# EAGLE board ospi_v10 (EAGLE 6.4)
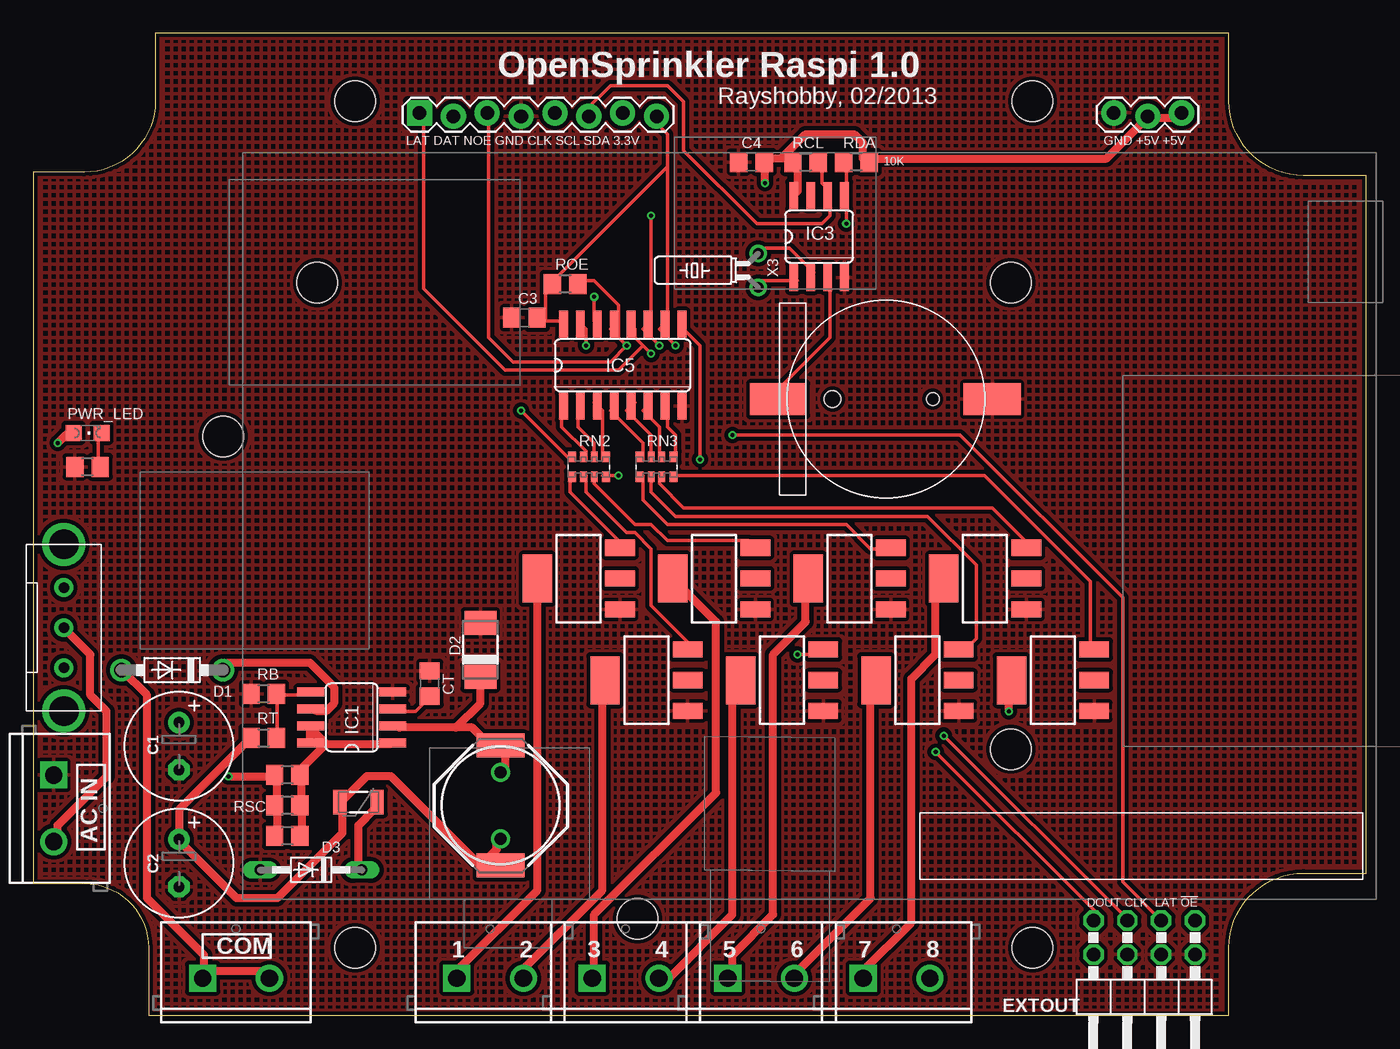
[diagram p0: board, top side]
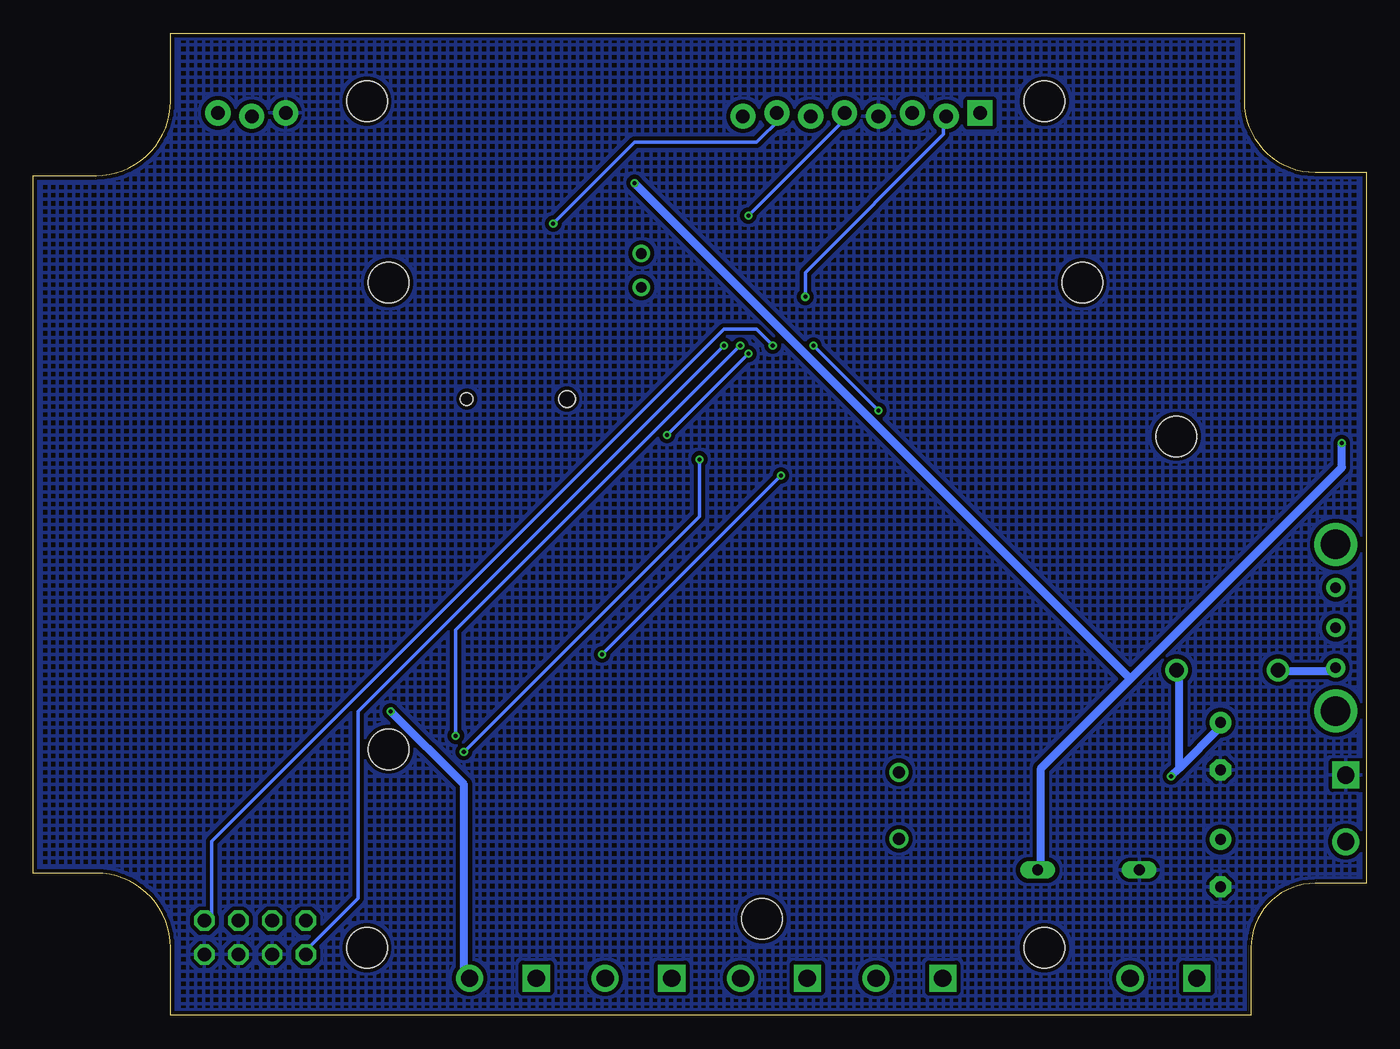
[diagram p1: board, bottom side, seen from below]

Size 99.95 x 73.66 mm. Coordinates in mm from the lower left corner, seen from the top.
Outline: 8.64,0 89.66,0 89.66,5.08 arc-90 95.25,10.67 99.95,10.67 99.95,62.99 95.25,62.99 arc-90 89.66,68.58 89.66,73.66 9.14,73.66 9.14,68.58 arc-90 3.81,63.25 0,63.25 0,9.91 3.81,9.91 arc-90 8.64,5.08 8.64,0
Copper layers (1*16): Top 0.035mm / dielectric 1.5mm / Bottom 0.035mm
Design rules "Fusion_eagle_rule_v1.1": minimum track width 6mil, minimum drill 12mil, track to track 6mil, track to pad 6mil, pad to pad 6mil, via to via 6mil, smd to smd 0mil, copper to edge 10mil, drill to drill 10mil, minimum pad ring 10mil, minimum via ring 6mil, stop-mask expansion 2mil, vias tented up to drill 100mil, thermal gap 10mil
Net classes: 0 default: width 0.254 mm, clearance 0.203 mm; 1 power: width 0.61 mm, clearance 0.203 mm
Holes 3.05 mm at 24.13,5.08 74.93,5.08 24.13,68.58 74.93,68.58
vRestrict: area 21.6,2.5 to 26.7,7.6; area 72.4,2.5 to 77.5,7.6; area 3.3,12.7 to 5.3,18.5; area 12.7,4.3 to 17.8,6.1; area 72.6,0.3 to 78.2,1.3

## Footprints (pad centres in the part's own frame; a part is rotated, then mirrored left to right if it is on the bottom)
BATTCON_12MM_SMT = smd 2.4 x 4.3: P$1 0,11.96 | smd 2.4 x 4.2: P$2 0,-4.1 | hole 0.95: 0,7.5 | hole 1.25: 0,0
E3,5-8 = drill 0.813 pad 1.6: + -1.778,0 | drill 0.813 pad 1.6 octagon: - 1.778,0
C0805 = smd 1.3 x 1.5: 1 -0.95,0; 2 0.95,0
SCREWTERMINAL-5MM-2 = drill 1.3 pad 2.032 square: 1 0,0 | drill 1.3 pad 2.032: 2 5,0
DO41-7.6 = drill 1.1 pad 1.7: A 3.81,0; C -3.81,0
DO-214AC = smd 1.8 x 2.4: A 2.025,0; C -2.025,0
DO34-7 = drill 0.813 long: A 3.81,0; C -3.81,0
2X04/90 = drill 1.016 octagon: 1 -3.81,-6.35; 2 -3.81,-3.81; 3 -1.27,-6.35; 4 -1.27,-3.81; 5 1.27,-6.35; 6 1.27,-3.81; 7 3.81,-6.35; 8 3.81,-3.81
PTC-1206 = smd 1 x 1.8: 1 -1.4,0; 2 1.4,0
SO08 = smd 0.66 x 2.032: 1 -1.905,-3.073; 2 -0.635,-3.073; 3 0.635,-3.073; 4 1.905,-3.073; 5 1.905,3.073; 6 0.635,3.073; 7 -0.635,3.073; 8 -1.905,3.073
SO16 = smd 0.66 x 2.032: 1 -4.445,-3.073; 2 -3.175,-3.073; 3 -1.905,-3.073; 4 -0.635,-3.073; 5 0.635,-3.073; 6 1.905,-3.073; 7 3.175,-3.073; 8 4.445,-3.073; 9 4.445,3.073; 10 3.175,3.073; 11 1.905,3.073; 12 0.635,3.073; 13 -0.635,3.073; 14 -1.905,3.073; 15 -3.175,3.073; 16 -4.445,3.073
EG1206 = drill 0.8 pad 1.422: 1 -3,0; 2 0,0; 3 3,0 | drill 2.2: MT1 -6.25,0; MT2 6.25,0
1X08_LOCK = drill 1.016 pad 1.88 square: 1 0,0.127 | drill 1.016 pad 1.88: 2 2.54,-0.127; 3 5.08,0.127; 4 7.62,-0.127; 5 10.16,0.127; 6 12.7,-0.127; 7 15.24,0.127; 8 17.78,-0.127
1X03_LOCK = drill 1.016 pad 1.88: 1 0,0.127; 2 2.54,-0.127; 3 5.08,0.127
SRU1038 = smd 1.8 x 3.6: 1 -4.5,0; 2 4.5,0
6000-XXXX-RC = drill 0.9 pad 1.422: 1 -2.5,0; 2 2.5,0
CHIPLED_0805 = smd 1.2 x 1.2: A 0,-1.05; C 0,1.05
R0805 = smd 1.3 x 1.5: 1 -0.95,0; 2 0.95,0
EXB38V = smd 0.6 x 0.8: 1 -1.275,-0.75; 4 1.275,-0.75; 5 1.275,0.75; 8 -1.275,0.75 | smd 0.5 x 0.8: 2 -0.4,-0.75; 3 0.4,-0.75; 6 0.4,0.75; 7 -0.4,0.75
SOT223 = smd 1.219 x 2.235: 1 -2.311,-3.099; 2 0,-3.099; 3 2.311,-3.099 | smd 3.6 x 2.2: 4 0,3.099
OSPI = hole 3.048: 25,-6; 53,6.735; 84.06,-29.465; 77,-41; 25,-41
TC26H = drill 0.813: 1 -1.27,0; 2 1.27,0

## Placement (x,y rotation side)
BAT1  [BATTCON_12MM_SMT]  59.94,46.23 270 top
C1  100u  [E3,5-8]  10.92,20.19 270 top
C2  470u  [E3,5-8]  10.92,11.43 270 top
C3  0.1u  [C0805]  36.83,52.32 180 top
C4  0.1u  [C0805]  53.85,64.01 180 top
COM  [SCREWTERMINAL-5MM-2]  12.7,2.79 0 top
CT  68pF  [C0805]  29.72,24.89 90 top
D1  R3000  [DO41-7.6]  10.41,25.91 180 top
D2  SS14  [DO-214AC]  33.53,27.43 90 top
D3  5.1V  [DO34-7]  20.83,10.92 180 top
EXTOUT1  [2X04/90]  83.31,0.76 180 top
F1  PTCSMD  [PTC-1206]  24.38,16 180 top
IC1  MC33063/MC34063D  [SO08]  23.88,22.35 90 top
IC3  DS1307  [SO08]  58.93,58.42 0 top
IC5  74HC595N  [SO16]  44.2,48.77 0 top
J0  24VAC IN  [SCREWTERMINAL-5MM-2]  1.52,18.03 270 top
J2  EG1206  [EG1206]  2.29,29.08 270 top
JP1  [1X08_LOCK]  28.96,67.56 0 top
JP2  [1X03_LOCK]  81.03,67.56 0 top
L1  100uH  [SRU1038]  35.05,15.75 270 top
L1'  220uH  [6000-XXXX-RC]  35.05,15.75 270 top
PWR_LED  [CHIPLED_0805]  4.06,43.69 270 top
RB  10K  [R0805]  17.27,24.13 180 top
RCL  10K  [R0805]  57.91,64.01 0 top
RDA  10K  [R0805]  61.72,64.01 180 top
RLED  330  [R0805]  4.06,41.15 180 top
RN2  [EXB38V]  41.66,41.15 0 top
RN3  [EXB38V]  46.74,41.15 0 top
ROE  10K  [R0805]  39.88,54.86 180 top
RSC  1.0  [R0805]  19.05,18.03 180 top
RSC1  1.0  [R0805]  19.05,15.75 180 top
RSC2  1.0  [R0805]  19.05,13.46 180 top
RT  30K  [R0805]  17.27,20.83 0 top
S12  [SCREWTERMINAL-5MM-2]  31.75,2.79 0 top
S34  [SCREWTERMINAL-5MM-2]  41.91,2.79 0 top
S56  [SCREWTERMINAL-5MM-2]  52.07,2.79 0 top
S78  [SCREWTERMINAL-5MM-2]  62.23,2.79 0 top
T1  MAC97  [SOT223]  40.89,32.77 90 top
T2  MAC97  [SOT223]  45.97,25.15 90 top
T3  MAC97  [SOT223]  51.05,32.77 90 top
T4  MAC97  [SOT223]  56.13,25.15 90 top
T5  MAC97  [SOT223]  61.21,32.77 90 top
T6  MAC97  [SOT223]  66.29,25.15 90 top
T7  MAC97  [SOT223]  71.37,32.77 90 top
T8  MAC97  [SOT223]  76.45,25.15 90 top
U$2  OSPI  [OSPI]  98.3,13.97 180 top
X3  32.657k  [TC26H]  54.36,55.88 90 top

## Library data of the parts
BAT1 JP1 L1 = SparkFunNew
C1 C2 = resistor
C3 C4 CT L1' RB RCL RDA RLED ROE RSC RSC1 RSC2 RT = rcl
COM F1 IC5 J0 JP2 S12 S34 S56 S78 T1-T8 = SparkFun
D1-D3 = diode
EXTOUT1 = pinhead
IC1 IC3 J2 PWR_LED = adafruit
RN2 RN3 = resistor-dil; OC_FARNELL: unknown; OC_NEWARK: unknown
U$2 = RaspberryPi
X3 = crystal; OC_FARNELL: unknown; OC_NEWARK: unknown

## Nets
24VAC [power]: COM.1 COM.2 D1.A J2.3
A1: EXTOUT1.1 IC5.13 JP1.3 ROE.1
D5: IC5.14 JP1.2
D6: EXTOUT1.5 IC5.11 JP1.5
D7: EXTOUT1.3 IC5.12 JP1.1
GND [power]: BAT1.P$1 C1.- C2.- C3.2 C4.2 CT.2 D2.A D3.A EXTOUT1.2 EXTOUT1.4 EXTOUT1.6 IC1.4 IC3.4 IC5.8 J0.1 JP1.4 JP2.1 RB.2 RLED.2 T1.1 T2.1 T3.1 T4.1 T5.1 T6.1 T7.1 T8.1
N$1: PWR_LED.C RLED.1
N$2 [power]: C1.+ D1.C IC1.6 RSC1.2 RSC2.2 RSC.2
N$3: RN2.1 T1.3
N$4: IC5.5 RN3.7
N$5: IC5.6 RN3.6
N$6 [power]: J0.2 J2.2
N$7: IC5.7 RN3.5
N$10: IC5.4 RN3.8
N$11: IC5.3 RN2.5
N$12: IC5.2 RN2.6
N$13: IC5.1 RN2.7
N$14: IC5.15 RN2.8
N$15: RN2.2 T2.3
N$16 [power]: S12.1 T1.4
N$17 [power]: S12.2 T2.4
N$18 [power]: S34.1 T3.4
N$19: RN2.3 T3.3
N$20 [power]: S34.2 T4.4
N$21: RN2.4 T4.3
N$22 [power]: S56.1 T5.4
N$23 [power]: S56.2 T6.4
N$24 [power]: S78.1 T7.4
N$25 [power]: S78.2 T8.4
N$26: RN3.1 T5.3
N$27: RN3.2 T6.3
N$28: RN3.3 T7.3
N$29: RN3.4 T8.3
N$36: BAT1.P$2 IC3.3
N$40 [power]: IC1.1 IC1.7 IC1.8 RSC1.1 RSC2.1 RSC.1
N$46 [power]: D2.C IC1.2 L1'.1 L1.1
N$47: IC3.1 X3.1
N$49: CT.1 IC1.3
N$50: IC3.2 X3.2
N$55: IC1.5 RB.1 RT.2
QH*: EXTOUT1.7 IC5.9
SCL: IC3.6 JP1.6 RCL.2
SDA: IC3.5 JP1.7 RDA.2
VCC: C3.1 EXTOUT1.8 IC5.10 IC5.16 JP1.8 ROE.2
VIN [power]: C4.1 D3.C F1.1 IC3.8 JP2.2 JP2.3 PWR_LED.A RCL.1 RDA.1
VIN_PRE [power]: C2.+ F1.2 L1'.2 L1.2 RT.1

## Tracks (layer width: path | path; a pad name or v marks a point on that pad's centre or on a via)
24VAC
  Top 0.61: 12.8,3.3 17.68,3.3 COM.2 | 12.8,3.3 12.8,4.52 8.53,8.79 8.53,24.03 6.71,25.86 D1.A | 12.8,3.3 COM.1
  Bottom 0.61: J2.3 2.44,25.86 6.1,25.86 D1.A
A1  (via drill 0.3)
  Top 0.254: 43.89,52.07 43.89,53.29 42.06,55.12 40.84,55.12 ROE.1 | 43.89,52.07 43.28,51.46 IC5.13 | 43.89,52.07 43.89,50.85 v44.5,50.24 43.28,49.02 35.97,49.02 34.14,50.85 34.14,67.31 JP1.3
  Bottom 0.254: v44.5,50.24 45.72,51.46 48.16,51.46 86.56,13.06 86.56,7.57 EXTOUT1.1
D5  (via drill 0.3)
  Top 0.254: v42.06,53.9 42.06,52.07 IC5.14
  Bottom 0.254: v42.06,53.9 42.06,55.73 31.7,66.09 31.7,67.31 JP1.2
D6  (via drill 0.3)
  Top 0.254: v46.33,59.99 46.33,52.07 IC5.11 45.72,51.46 v46.94,50.24 | v68.28,20.98 81.69,7.57 EXTOUT1.5
  Bottom 0.254: v46.33,59.99 39.01,67.31 JP1.5 | v68.28,20.98 68.28,28.91 v46.94,50.24
D7  (via drill 0.3)
  Top 0.254: 45.72,50.24 45.11,50.85 45.11,51.46 IC5.12 | 45.72,50.24 43.89,48.41 35.36,48.41 29.26,54.51 29.26,67.31 JP1.1 | EXTOUT1.3 81.69,10.01 81.69,31.34 69.49,43.54 v52.43,43.54 | 45.72,50.24 v46.33,49.63
  Bottom 0.254: v46.33,49.63 v52.43,43.54
GND
  pour Bottom (isolate 0.305, hatched): 0,73.91 101.6,73.91 101.6,0.25 0,0.25
  pour Top (isolate 0.305, hatched): 0,73.91 101.6,73.91 101.6,0.25 0,0.25
N$1
  Top 0.254: PWR_LED.C 4.88,43.54 4.88,41.71 RLED.1
N$2  (via drill 0.3)
  Top 0.61: IC1.6 21.34,22.81 21.95,22.81 22.55,23.42 22.55,24.64 20.73,26.47 14.63,26.47 D1.C | RSC2.2 18.29,13.66 18.29,15.49 RSC1.2 18.29,16.1 18.29,17.93 RSC.2 17.68,17.93 v14.63,17.93
  Bottom 0.61: 14.02,18.54 10.97,21.59 C1.+ | 14.02,18.54 v14.63,17.93 | 14.02,18.54 14.02,25.86 D1.C
N$3
  Top 0.254: RN2.1 40.23,40.49 40.23,39.27 43.89,35.61 T1.3
N$4
  Top 0.254: RN3.7 46.33,41.71 46.33,43.54 44.5,45.36 IC5.5 45.11,45.97
N$5
  Top 0.254: RN3.6 46.94,41.71 46.94,44.14 45.72,45.36 46.33,45.97 IC5.6
N$6
  Top 0.61: J2.2 2.44,28.91 4.27,27.08 4.27,24.03 5.49,22.81 5.49,17.93 1.83,14.28 1.83,13.06 J0.2
N$7
  Top 0.254: RN3.5 48.16,41.71 48.16,43.54 47.55,44.14 47.55,45.36 IC5.7
N$10
  Top 0.254: RN3.8 45.72,41.71 45.72,42.93 43.28,45.36 IC5.4
N$11
  Top 0.254: RN2.5 42.67,41.71 42.67,45.36 42.06,45.97 IC5.3
N$12
  Top 0.254: RN2.6 42.06,41.71 42.06,42.93 40.84,44.14 40.84,45.36 IC5.2
N$13
  Top 0.254: RN2.7 41.45,41.71 41.45,42.32 39.62,44.14 39.62,45.36 IC5.1
N$14  (via drill 0.3)
  Top 0.254: v36.58,45.36 40.23,41.71 RN2.8 | v41.45,50.24 41.45,51.46 40.84,52.07 IC5.15
  Bottom 0.254: v41.45,50.24 v36.58,45.36
N$15
  Top 0.254: RN2.2 41.45,40.49 41.45,39.27 44.5,36.22 45.11,36.22 46.33,35 46.33,30.73 49.38,27.69 T2.3
N$16
  Top 0.61: T1.4 37.8,32.56 37.8,9.4 31.7,3.3 S12.1
N$17
  Top 0.61: T2.4 42.67,24.64 42.67,9.4 36.58,3.3 S12.2
N$18
  Top 0.61: T3.4 48.16,32.56 51.21,29.52 51.21,16.71 42.06,7.57 42.06,3.3 S34.1
N$19
  Top 0.254: RN2.3 42.06,40.49 42.06,39.88 45.11,36.83 46.33,36.83 47.55,35.61 53.65,35.61 T3.3
N$20
  Top 0.61: T4.4 52.43,24.64 52.43,7.57 47.55,2.69 46.94,2.69 S34.2
N$21  (via drill 0.3)
  Top 0.254: v43.89,40.49 42.67,40.49 RN2.4 | v57.3,27.08 59.13,27.08 T4.3
  Bottom 0.254: v57.3,27.08 v43.89,40.49
N$22
  Top 0.61: T5.4 57.91,32.56 57.91,29.52 55.47,27.08 55.47,7.57 52.43,4.52 52.43,3.3 S56.1
N$23
  Top 0.61: T6.4 62.79,24.64 62.79,8.79 57.3,3.3 S56.2
N$24
  Top 0.61: T7.4 67.67,32.56 67.67,27.08 65.84,25.25 65.84,6.96 62.18,3.3 S78.1
N$25  (via drill 0.3)
  Top 0.61: v73.15,22.81 73.15,24.64 T8.4
  Bottom 0.61: v73.15,22.81 67.67,17.32 67.67,3.3 S78.2
N$26
  Top 0.254: RN3.1 45.72,40.49 45.72,38.66 47.55,36.83 60.96,36.83 62.79,35 64.01,35 T5.3
N$27
  Top 0.254: RN3.2 46.33,40.49 46.33,39.27 48.16,37.44 67.06,37.44 70.71,33.78 70.71,28.3 69.49,27.08 T6.3
N$28
  Top 0.254: RN3.3 46.94,40.49 46.94,39.88 48.77,38.05 71.93,38.05 74.37,35.61 T7.3
N$29
  Top 0.254: RN3.4 48.16,40.49 71.32,40.49 79.25,32.56 79.25,27.69 T8.3
N$36
  Top 0.254: IC3.3 59.74,55.12 59.74,50.85 55.47,46.58 BAT1.P$2
N$40
  Top 0.61: RSC2.1 20.12,13.66 20.12,15.49 RSC1.1 20.12,16.1 20.12,17.93 RSC.1 20.12,18.54 21.95,20.37 | 20.73,21.59 20.73,20.37 IC1.8 | 21.95,20.37 26.82,20.37 IC1.1 | 20.73,21.59 21.95,20.37 | 20.73,21.59 IC1.7
N$46
  Top 0.61: 31.7,21.59 32.92,21.59 34.75,19.76 L1.1 35.36,19.76 35.36,18.54 L1'.1 | 31.7,21.59 27.43,21.59 IC1.2 | D2.C 33.53,23.42 31.7,21.59
N$47
  Top 0.254: IC3.1 57.3,55.12 54.25,55.12 X3.1
N$49
  Top 0.254: CT.1 29.26,23.42 28.65,22.81 27.43,22.81 IC1.3
N$50
  Top 0.254: IC3.2 58.52,55.73 56.69,57.56 54.86,57.56 X3.2
N$55
  Top 0.254: 18.29,24.03 18.29,20.98 RT.2 | 18.29,24.03 20.73,24.03 IC1.5 | 18.29,24.03 RB.1
QH*  (via drill 0.3)
  Top 0.254: v49.99,41.71 49.99,50.24 48.77,51.46 IC5.9 | v67.67,19.76 79.86,7.57 EXTOUT1.7
  Bottom 0.254: v49.99,41.71 49.99,37.44 v67.67,19.76
SCL
  Top 0.254: RCL.2 59.13,63.65 59.13,62.43 59.74,61.82 IC3.6 59.74,61.21 59.74,59.99 59.13,59.38 54.25,59.38 48.77,64.87 48.77,68.53 47.55,69.75 43.28,69.75 41.45,67.92 JP1.6
SDA  (via drill 0.3)
  Top 0.254: RDA.2 60.96,63.65 60.96,61.82 IC3.5 60.96,61.21 v60.96,59.38
  Bottom 0.254: v60.96,59.38 54.86,65.48 45.72,65.48 43.89,67.31 JP1.7
VCC  (via drill 0.3)
  Top 0.254: 38.41,52.07 39.62,52.07 IC5.16 | 38.41,52.07 37.8,52.07 C3.1 38.41,52.07 | 38.41,52.07 38.41,54.51 ROE.2 39.01,55.12 47.55,63.65 | 47.55,63.65 47.55,66.09 46.33,67.31 JP1.8 | 47.55,63.65 47.55,52.07 | v48.16,50.24 46.94,51.46 47.55,52.07 | 47.55,52.07 IC5.10
  Bottom 0.254: v48.16,50.24 75.59,22.81 75.59,8.79 79.25,5.13 EXTOUT1.8
VIN  (via drill 0.3)
  Top 0.61: JP2.3 85.95,67.31 84.12,67.31 JP2.2 83.52,67.31 80.47,64.26 62.79,64.26 RDA.1 62.18,64.26 62.18,65.48 61.57,66.09 57.91,66.09 56.08,64.26 | 56.08,64.26 56.69,64.26 RCL.1 57.3,63.65 57.3,61.82 IC3.8 | 56.08,64.26 54.86,64.26 C4.1 54.86,63.65 v54.86,62.43 | v1.83,42.93 2.44,43.54 PWR_LED.A | F1.1 25.6,15.49 24.38,14.28 24.38,11.23 D3.C
  Bottom 0.61: v1.83,42.93 1.83,41.1 17.68,25.25 | 17.68,25.25 24.38,18.54 24.38,11.23 D3.C | 17.68,25.25 v54.86,62.43
VIN_PRE
  Top 0.61: RT.1 15.85,20.37 10.97,15.49 10.97,13.66 C2.+ 10.97,13.06 15.24,8.79 18.29,8.79 23.16,13.66 23.16,15.49 F1.2 23.16,16.1 24.99,17.93 26.82,17.93 33.53,11.23 | 33.53,11.23 34.75,11.23 L1.2 33.53,11.23 | 33.53,11.23 34.75,12.45 34.75,13.06 L1'.2

## Text on the board
tNames: OpenSprinkler Raspi 1.0 | Rayshobby, 02/2013 | LAT DAT NOE GND CLK SCL SDA 3.3V | GND +5V +5V | 10K | AC IN | DOUT CLK LAT !OE | 1 | 2 | 3 | 4 | 5 | 6 | 7 | 8 | EXTOUT
BoxDim: Serpac WM-032C Enclosure | All units are in inch | Left | Right | Front | Bottom